# Altium PCB PDB_Rev2.PcbDoc (part 1 of 2)
Units mil, origin at the board's own origin, x right, y up, seen from the top; angles counter-clockwise.
Board outline 2952.76 x 3937.01 mil, 2 copper layers (Top Layer, Bottom Layer); 43 components, 21 nets, 155 pads, 33 vias.
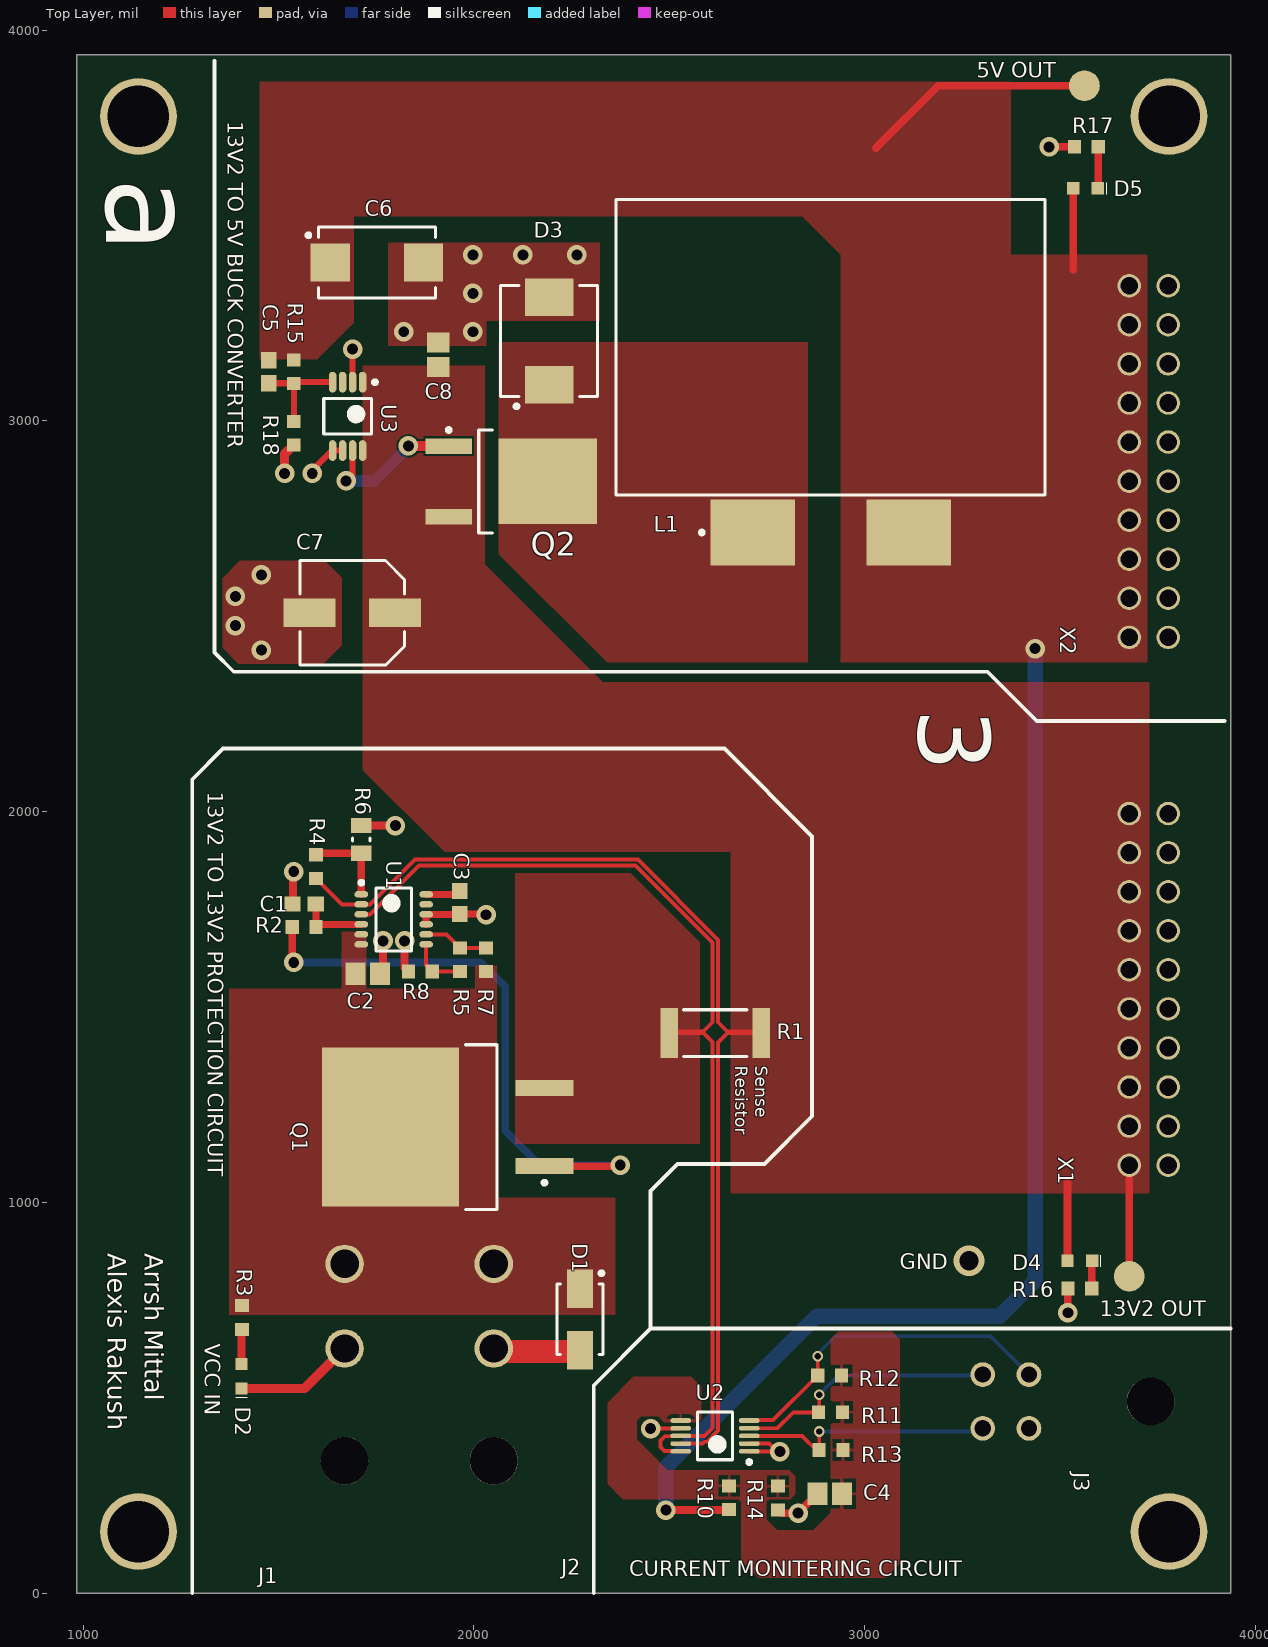
[diagram p0: Top Layer view]
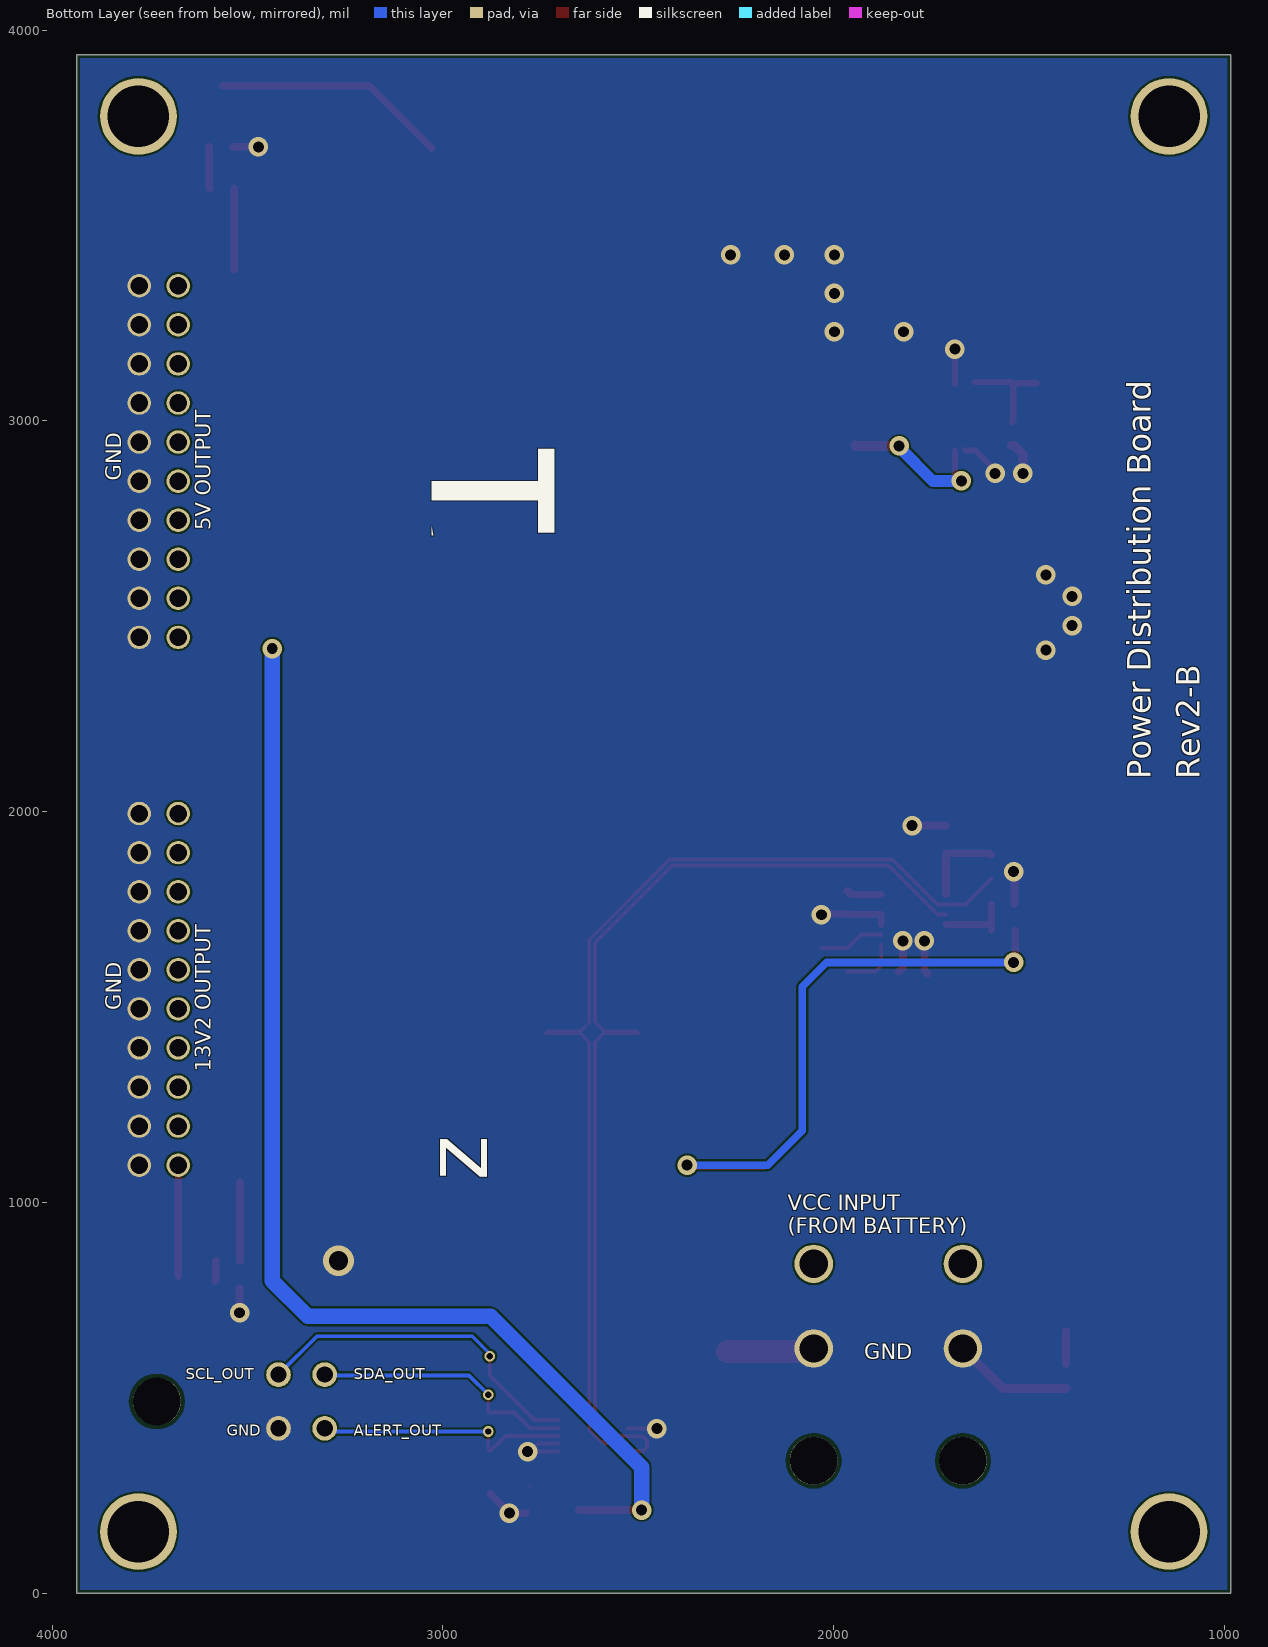
[diagram p1: Bottom Layer view, seen from below]
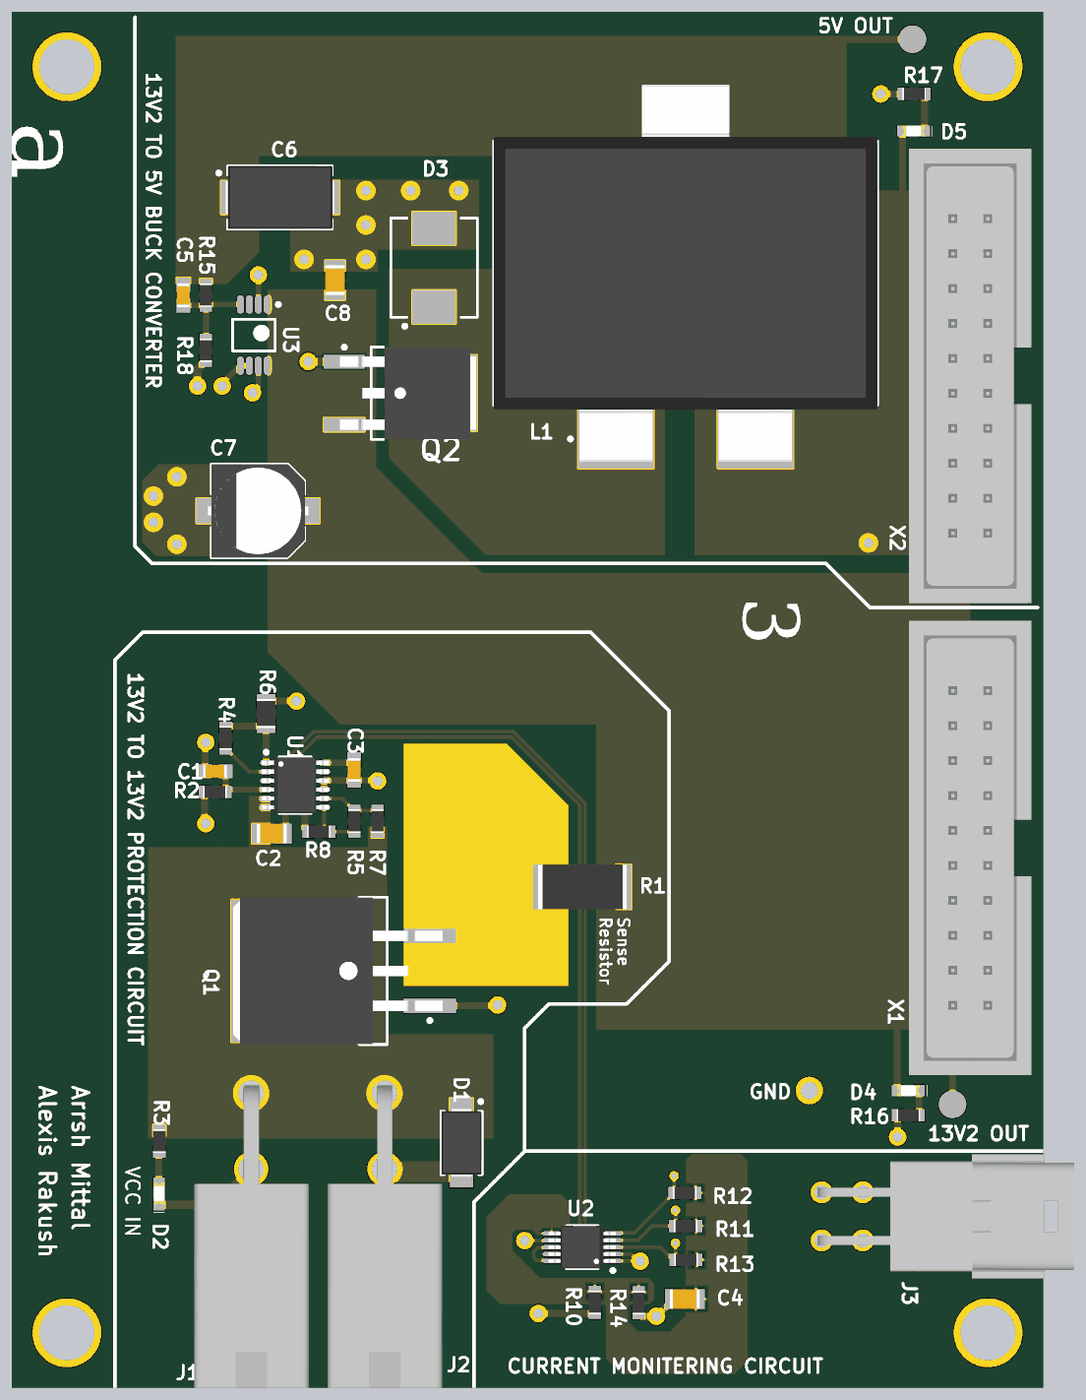
[diagram p2: 3D render of the assembled board from above, using the file's embedded part models]

## Layer stack, top to bottom
Top Solder: solder mask 0.4, Solder Resist, Dk 3.5
Top Layer: signal copper 1.4
Dielectric 1: dielectric 12.6, FR-4, Dk 4.8
Bottom Layer: signal copper 1.4
Bottom Solder: solder mask 0.4, Solder Resist, Dk 3.5

## Board outline
984.25,0 3937.01,0 3937.01,3937.01 984.25,3937.01

## Design rules (kind name [scope] priority, off if disabled: settings)
BoardOutlineClearance [All] p1: gap=7.87 ignorepadtopadclearanceinfootprint=FALSE
Clearance "Stitching HV_GND" [IsStitchingVia and InNet('HV_GND') vs (IsVia and (Not IsStitchingVia)) Or IsPad] p1: gap=5 ignorepadtopadclearanceinfootprint=FALSE
Clearance [All] p2: gap=5 ignorepadtopadclearanceinfootprint=FALSE except(7.87: Arc-SMDPad Track-SMDPad; 9.84: SMDPad-Hole THPad-Hole Via-Hole Fill-Hole Poly-Hole Region-Hole Text-Hole; 10: Arc-Via Arc-Hole Track-Via Track-Hole Via-Via; 12.99: Arc-THPad Track-THPad; 21.26: SMDPad-THPad THPad-THPad)
ComponentClearance [All] p1: gap=5 collisioncheckmode=3 verticalgap=5 showdistances=TRUE
DiffPairsRouting [All] p1: maxlimit=10 minlimit=5 mostfreqgap=5 toplayer_minwidth=5 toplayer_maxwidth=1000 toplayer_prefwidth=5 bottomlayer_minwidth=5 bottomlayer_maxwidth=1000 bottomlayer_prefwidth=5 maxuncoupledlength=500
Height [All] p1: minheight=0 maxheight=71497.94 prefheight=500
HoleSize [All] p1: absolutevalues=TRUE maxlimit=248.03 minlimit=11.81 maxpercent=80.000 minpercent=20.000
HoleToHoleClearance [All] p1: gap=9.84 allowstackedmicrovias=FALSE
MinimumAnnularRing [All] p1: minimumring=3
MinimumSolderMaskSliver [All] p1: minsoldermaskwidth=0
PlaneClearance [All] p1: clearance=5
PlaneConnect PlaneConnectPowerPads [InPadClass('PowerPads')] p1: planeconnectstyle=Direct reliefexpansion=20 reliefentries=4 reliefconductorwidth=10 reliefairgap=10
PlaneConnect [All] p2: pad.planeconnectstyle=Relief pad.reliefexpansion=11.81 pad.reliefentries=4 pad.reliefconductorwidth=10 pad.reliefairgap=5 via.planeconnectstyle=Direct via.reliefexpansion=11.81 via.reliefentries=4 via.reliefconductorwidth=5 via.reliefairgap=5
PolygonConnect HighPowerLines [InNet('13V_N') or InNet('13V_P') or InNet('5V_OUT') or InNet('NetD3_1') or InNet('Vcc') or InNet('GND')] p1: connectstyle=Direct reliefconductorwidth=10 reliefentries=4 polygonreliefangle="90 Angle" airgapwidth=10
PolygonConnect PolygonConnectPowerPads [All vs (InPadClass('PowerPads'))] p2: connectstyle=Direct reliefconductorwidth=10 reliefentries=4 polygonreliefangle="90 Angle" airgapwidth=10
PolygonConnect [All] p3: thpad.connectstyle=Relief thpad.reliefconductorwidth=8 thpad.reliefentries=4 thpad.polygonreliefangle="90 Angle" thpad.airgapwidth=10 smdpad.connectstyle=Relief smdpad.reliefconductorwidth=8 smdpad.reliefentries=4 smdpad.polygonreliefangle="90 Angle" smdpad.airgapwidth=10 via.connectstyle=Direct via.reliefconductorwidth=8 via.reliefentries=4 via.polygonreliefangle="90 Angle" via.airgapwidth=10
RoutingVias [All] p1: holewidth=17.72 width=29.53 viastyle="Through Hole" minholewidth=11.81 minwidth=23.62 maxholewidth=23.62 maxwidth=259.84
SilkToSilkClearance [All] p1: silktosilkclearance=0
SilkToSolderMaskClearance [IsPad] p1: minsilkscreentomaskgap=0 clearancetoexposedcopper=TRUE
SolderMaskExpansion SolderMaskExpansion_Via [IsVia] p1: expansion=4
SolderMaskExpansion [All] p2: expansion=2.95
Width [All] p1: maxlimit=1000 minlimit=5.12 preferedwidth=10 minimp=50.000000 maximp=50.000000 favimp=50.000000
20 further rules are at their usual default settings.

## Classes and differential pairs
component class Designator: C4 C5 C6 C7 C8 D3 D4 D5 J3 L1 Q2 R10 R11 R12 R13 R14 R15 R16 R17 R18 U2 U3 X1 X2
component class Designator: C1 C2 C3 D1 D2 J1 J2 Q1 R1 R2 R3 R4 R5 R6 R7 R8 U1
differential pair 13V: +13V_P -13V_N

## Components (designator, comment, footprint, x,y, rotation, side; value= is the part's Value field where it differs from the comment)
C1 "47nF" CAP-0603 1565.94,1763.78 r0 top
C2 "0.1uF" CAP-0805 1728.26,1585.54 r180 top
C3 "0.1uF" CAP-0603 1964.57,1767.72 r90 top
C4 "0.1uF" CAP-0805 2910.91,254.09 r0 top
C5 "100pF" CAP-0603 1475.39,3125.98 r90 top
C6 "100uF" "CAPMP7343X31N 2917 Tantilum Cap" 1751.97,3405.51 r0 top
C7 "22uF" CAPAE7366X55M 1688.98,2508.86 r180 top
C8 "0.1uF" CAP-0805 1909.45,3169.29 r270 top
D1 "TVS DIODE" DIOM4326X24N 2271.65,700.79 r270 top
D2 "Red" LED-0603 1437.01,507.87 r90 top
D3 "40V" "DO-214AB (SMC)" 2192.91,3204.72 r90 top
D4 "Green" LED-0603 3598.43,881.89 r180 top
D5 "Green" LED-0603 3613.19,3626.97 r180 top
J1 "0768250002" 2X1PIN 1669.29,842.6 r0 top
J2 "0768250002" 2X1PIN 2051.18,842.6 r0 top
J3 "WM11594-ND" 2X2PIN 3421.01,421.57 r90 top
JP1 "Testpoint2" TP2 3677.64,811.02 r90 top
JP2 "Testpoint2" TP2 3562.99,3858.27 r90 top
L1 "10uH" "PQ2614BLA-100K footprint" 2913.39,3188.98 r90 top
Q1 "FDB33N25TM" DPAK254P1524X483-3N 1929.13,1192.91 r180 top
Q2 "DMP3028LK3-13" DPAK229P991X239-3N 2097.44,2845.47 r0 top
R1 "0.002R" RES-2512 2618.11,1433.07 r0 top
R2 "10R" RES-0603 1565.94,1704.72 r180 top
R3 "665Ω" RES-0603 1406.5,705.71 r90 top
R4 "47.5KR" RES-0603 1596.46,1859.25 r270 top
R5 "8.06K" RES-0603 1964.57,1621.06 r270 top
R6 "5.1K" RES-0805 1712.32,1929.13 r270 top
R7 "117K" RES-0603 2031.5,1621.06 r90 top
R8 "10K" RES-0603 1863.19,1590.55 r0 top
R10 "3.4KR" RES-0603 2653.54,244.09 r270 top
R11 "2.2K" RES-0603 2913.39,462.76 r0 top
R12 "2.2K" RES-0603 2910.91,557.24 r0 top
R13 "10K" RES-0603 2914.69,366.14 r0 top
R14 "6.65KR" RES-0603 2778.48,243.27 r270 top
R15 "24KR" RES-0603 1539.37,3125.98 r90 top
R16 "665R" RES-0603 3551.18,779.53 r0 top
R17 "180R" RES-0603 3567.91,3701.77 r0 top
R18 "7.87KR" RES-0603 1539.37,2968.5 r90 top
U1 "LT4363IMS-2#TRPBF" MSOP-12 1795.28,1724.41 r0 top
U2 "INA226AIDGSR" "10-TFSOP, 10-MSOP INA226" 2617.41,402.32 r180 top
U3 "LM3489MMX/NOPB" TSOP8-LM3489MMX/NOPB 1677.17,3011.81 r270 top
X1 "WM6548-ND" MOLEX_20pin(RECT) 3897.64,900.28 r90 top
X2 "WM6548-ND" MOLEX_20pin(RECT) 3897.64,2251.06 r90 top

## Footprints (in the part's own frame and the unit in brackets; to place one, negate y for a bottom-side part, rotate by r counter-clockwise, add the part's x,y. Pads: shape width x height; smd on the part's side, far side on the other; paste and mask are expansions set on the pad)
2X1PIN [mm]
  round 2.5 hole 1.85: 1(0,0) 2(0,-5.5)
  round 3.1 hole 3.1: 3(0,-12.8)
  body extent -4.15,-21.4 4.2,0.56, height 14.55
2X2PIN [mm]
  round 1.6 hole 1.06: 1(0,0) 2(3.5,0) 3(3.5,3) 4(0,3)
  round 3.1 hole 3.1: 5(1.75,-7.91)
  body extent -2.75,-15.37 6.25,3.3, height 13.78
"10-TFSOP, 10-MSOP INA226" [mm]
  oval 1.35x0.3 smd: 1(-2.225,1) 2(-2.225,0.5) 3(-2.225,0) 4(-2.225,-0.5) 5(-2.225,-1) 6(2.225,-1) 7(2.225,-0.5) 8(2.225,0) 9(2.225,0.5) 10(2.225,1)
  silkscreen extent -2.35,-1.55 1.15,1.82, body extent -2.45,-1.55 2.45,1.55, height 1.1
CAP-0603 [mm] "Chip Capacitor, 2-Leads, Body 1.60x0.80mm, IPC Medium Density"
  rect 1.05x1 smd: 1(-0.75,0) 2(0.75,0)
  body extent -0.87,-0.48 0.87,0.48, height 0.9
CAP-0805 [mm] "Chip Capacitor, 2-Leads, Body 2.00x1.25mm, IPC Medium Density"
  rect 1.3x1.45 smd: 1(-0.8,0) 2(0.8,0)
  body extent -1.1,-0.72 1.1,0.72, height 1.35
CAPAE7366X55M [mm] "Aluminum Electrolytic Capacitor, Body 6.60x6.60x5.50mm, IPC Low Density"
  rect 3.4x1.85 smd: 1(-2.775,0) 2(2.775,0)
  silkscreen extent -3.4,-3.4 3.4,3.4, body extent -3.65,-3.4 3.65,3.4, height 5.5
"CAPMP7343X31N 2917 Tantilum Cap" [mm] "Molded Capacitor, 2-Leads, Body 7.30x4.30mm, IPC Medium Density"
  rect 2.55x2.45 smd: 1(-3.025,0) 2(3.025,0)
  silkscreen extent -4.57,-2.3 3.8,2.3, body extent -4.02,-2.3 4.02,2.3, height 3.1
DIOM4326X24N [mm] "Molded Diode, 2-Leads, Body 4.30x2.61mm, IPC Medium Density"
  rect 2.5x1.7 smd: 1(-2,0) 2(2,0)
  silkscreen extent -3.12,-1.5 2.3,1.53, body extent -2.52,-1.46 2.52,1.46, height 2.4
"DO-214AB (SMC)" [mm] "Molded Diode, 2-Leads, Body 6.86x5.91mm, IPC Medium Density"
  rect 2.45x3.15 smd mask+0.075: 1(-2.85,0)
  rect 2.45x3.15 smd: 2(2.85,0)
  silkscreen extent -4.37,-3.15 3.6,3.15, body extent -3.55,-3.11 3.56,3.11, height 2.62
DPAK229P991X239-3N [mm] "D-PAK, 3-Pads, Body 6.20x6.71mm (max), IPC Medium Density"
  rect 3x1 smd: 1(-4.1,2.29) 3(-4.1,-2.29)
  rect 6.4x5.55 smd: 2(2.35,0)
  silkscreen extent -4.22,-3.35 -1.25,3.46, body extent -4.42,-3.35 5.49,3.35, height 2.39
DPAK254P1524X483-3N [mm] "D2-PAK, 3-Pads, Body 7.93x8.70mm (max), IPC Medium Density"
  rect 3.8x1.05 smd: 1(-6.4,2.54) 3(-6.4,-2.54)
  rect 8.9x10.35 smd: 4(3.6,0)
  silkscreen extent -6.53,-5.35 -1.25,5.35, body extent -7.35,-5.33 7.9,5.33, height 5.08
LED-0603 [mm]
  rect 0.8x0.8 smd: 1(2,0.8) 2(0.4,0.8)
  silkscreen extent -0.18,0.43 -0.18,1.17, body extent 0.4,0.4 2,1.2, height 0.7
MOLEX_20pin(RECT) [mil]
  round 60 hole 44.88: 1(195,220) 2(295,220) 3(395,220) 4(495,220) 5(595,220) 6(695,220) 7(795,220) 8(895,220) 9(995,220) 10(1095,220) 11(195,120) 12(295,120) 13(395,120) 14(495,120) 15(595,120) 16(695,120) 17(795,120) 18(895,120) 19(995,120) 20(1095,120)
  body extent -6,-6 1294,344, height 366
MSOP-12 [mm] "TSOP, 12-Leads, Body 4.04x3.00mm, Pitch 0.65mm, IPC Medium Density"
  oval 0.889x0.42 smd: 1(-2.107,1.625) 2(-2.107,0.975) 3(-2.107,0.325) 4(-2.107,-0.325) 5(-2.107,-0.975) 6(-2.107,-1.625) 7(2.107,-1.625) 8(2.107,-0.975) 9(2.107,-0.325) 10(2.107,0.325) 11(2.107,0.975) 12(2.107,1.625)
  silkscreen extent -2.23,-2.05 1.15,2.51, body extent -2.45,-2.05 2.45,2.05, height 1.1
"PQ2614BLA-100K footprint" [mm] "SOT223, 3-Leads, Body 27.90x27.51mm (avg), Pitch 10.15mm, IPC Medium Density"
  rect 4.3x5.5 smd: 1(-12.05,5.075) 2(-12.05,-5.075)
  silkscreen extent -12.17,-13.95 9.6,13.95, body extent -13.71,-13.95 13.71,13.95, height 16
RES-0603 [mm] "Chip Resistor, 2-Leads, Body 1.60x0.80mm, IPC Medium Density"
  rect 0.85x0.9 smd: 1(-0.775,0) 2(0.775,0)
  body extent -0.85,-0.45 0.85,0.45, height 0.55
RES-0805 [mm] "Chip Resistor, 2-Leads, Body 2.00x1.25mm, IPC Medium Density"
  rect 1x1.35 smd: 1(-0.9,0) 2(0.9,0)
  silkscreen extent -0.1,-0.58 0.1,0.58, body extent -1.05,-0.67 1.05,0.67, height 0.6
RES-2512 [mm] "Chip Resistor, 2-Leads, Body 6.35x3.10mm, IPC Medium Density"
  rect 1.15x3.25 smd: 1(-3,0) 2(3,0)
  silkscreen extent -2.05,-1.52 2.05,1.53, body extent -3.22,-1.63 3.22,1.63, height 0.65
TP2 [mm]
  round 2 smd: 1(0,0)
TSOP8-LM3489MMX/NOPB [mm] "TSOP, 8-Leads, Body 3.00x3.00mm, Pitch 0.65mm, IPC Medium Density"
  oval 1.35x0.5 smd: 1(-2.225,0.975) 2(-2.225,0.325) 3(-2.225,-0.325) 4(-2.225,-0.975) 5(2.225,-0.975) 6(2.225,-0.325) 7(2.225,0.325) 8(2.225,0.975)
  silkscreen extent -2.35,-1.55 1.15,1.9, body extent -1.55,-1.55 1.55,1.55, height 1.1

## Part data
C1: library part 0603-47nF-50V, "CAP CER 0.047UF 50V X7R 0603", Case/Package=0603, Case Code (Metric)=1608, Dielectric=X7R, Manufacturer=Yageo, Manufacturer Part Number=CC0603KRX7R9BB473, Max Operating Temperature=125°C, Min Operating Temperature=-55°C, Package Quantity=1, Supplier Part Number 1=311-1427-6-ND, Tolerance=10%, Voltage=50V, Capacitance=47nF, Case Code (Imperial)=0603, ComponentLink1Description=http://www.yageo.com/documents/recent/UPY-GPHC_X7R_6.3V-to-50V_18.pdf?src-supplier=Digi-Key, ComponentLink1URL=http://www.yageo.com/documents/recent/UPY-GPHC_X7R_6.3V-to-50V_18.pdf?src-supplier=Digi-Key, ComponentLink2Description=http://www.yageo.com/exep/pages/download/literatures/ProductSelectionGuide%202014_Final_2.pdf?src-supplier=Digi-Key, ComponentLink2URL=http://www.yageo.com/exep/pages/download/literatures/ProductSelectionGuide%202014_Final_2.pdf?src-supplier=Digi-Key, ComponentLink3Description=http://documents.rs-components.com/techlib://itc_doclist_GB.htm?stockno=6698811&src-supplier=RSComponents, ComponentLink3URL=http://documents.rs-components.com/techlib://itc_doclist_GB.htm?stockno=6698811&src-supplier=RSComponents, ComponentLink4Description=http://www.farnell.com/datasheets/1489800.pdf?src-supplier=Element14, ComponentLink4URL=http://www.farnell.com/datasheets/1489800.pdf?src-supplier=Element14, ComponentLink5Description=https://www.verical.com/server-webapp/html/getDatasheet?partID=403593&src-supplier=Verical, ComponentLink5URL=https://www.verical.com/server-webapp/html/getDatasheet?partID=403593&src-supplier=Verical, Composition=Ceramic, Depth=0.8mm, Halogen Free="Halogen Free", Height=0.8mm, Lead Free="Lead Free", Length=1.6mm, Mount="Surface Mount", Packaging="Tape and Reel", Pricing 1="1=0.1, 10=0.058, 100=0.0257, 500=0.01836, 1000=0.01443 (USD)", Radiation Hardening=No, REACH SVHC=Unknown, Stock 1=196940, Supplier 1=Digi-Key, Termination=SMD/SMT, Thickness=0.035inch, Voltage Rating=50V, Voltage Rating (DC)=50V, Width=0.031inch
C2 C8: library part 0805-0.1uF-50V, "CAP CER 0.1UF 50V Y5V 0805", Capacitance=100nF, Case/Package=0805, Case Code (Metric)=2012, Dielectric=Y5V, Dielectric Material=Ceramic, Manufacturer=KEMET, Manufacturer Part Number=C0805C104Z5VACTU, Max Operating Temperature=85°C, Min Operating Temperature=-30°C, Package Quantity=1, Supplier Part Number 1=399-1177-6-ND, Tolerance=80%, Voltage=50V, Case Code (Imperial)=0805, ComponentLink1Description=http://www.alliedelec.com/m/d/9bfe7773041ffe9d406e68bc7b377fdd.pdf?src-supplier=Allied+Electronics, ComponentLink1URL=http://www.alliedelec.com/m/d/9bfe7773041ffe9d406e68bc7b377fdd.pdf?src-supplier=Allied+Electronics, ComponentLink2Description=https://www.verical.com/server-webapp/html/getDatasheet?partID=37101&src-supplier=Verical, ComponentLink2URL=https://www.verical.com/server-webapp/html/getDatasheet?partID=37101&src-supplier=Verical, ComponentLink3Description=https://www.verical.com/server-webapp/html/getDatasheet?partID=321176&src-supplier=Verical, ComponentLink3URL=https://www.verical.com/server-webapp/html/getDatasheet?partID=321176&src-supplier=Verical, ComponentLink4Description=http://www.farnell.com/datasheets/2123124.pdf?src-supplier=Element14, ComponentLink4URL=http://www.farnell.com/datasheets/2123124.pdf?src-supplier=Element14, Depth=1.25mm, Dissipation Factor=5%, Height=0.9mm, Lead Free="Lead Free", Lead Pitch=0.75mm, Length=2mm, Mount="Surface Mount,PCB", Number of Pins=2, Packaging="Tape and Reel", Pricing 1="1=0.1, 10=0.057, 100=0.0254, 500=0.01818, 1000=0.01428 (USD)", Radiation Hardening=No, REACH SVHC="No SVHC", Stock 1=929243, Supplier 1=Digi-Key, Termination=SMD/SMT, Thickness=0.039inch, Voltage Rating=50V, Voltage Rating (DC)=50V, Width=0.049inch
C3: library part 0603-0.1uF-16V, "CAP CER 0.1UF 16V X7R 0603", Capacitance=100nF, Case/Package=0603, Case Code (Metric)=1608, Dielectric=X7R, Dielectric Material=Ceramic, Manufacturer=KEMET, Manufacturer Part Number=C0603C104M4RACTU, Max Operating Temperature=125°C, Min Operating Temperature=-55°C, Package Quantity=1, Supplier Part Number 1=399-1099-6-ND, Tolerance=20%, Voltage Rating=16V, Case Code (Imperial)=0603, ComponentLink1Description=https://www.verical.com/server-webapp/html/getDatasheet?partID=66190&src-supplier=Verical, ComponentLink1URL=https://www.verical.com/server-webapp/html/getDatasheet?partID=66190&src-supplier=Verical, ComponentLink2Description=http://www.farnell.com/datasheets/2746055.pdf?src-supplier=Element14, ComponentLink2URL=http://www.farnell.com/datasheets/2746055.pdf?src-supplier=Element14, ComponentLink3Description=http://www.farnell.com/datasheets/2123765.pdf?src-supplier=Element14, ComponentLink3URL=http://www.farnell.com/datasheets/2123765.pdf?src-supplier=Element14, ComponentLink4Description=http://www.alliedelec.com/m/d/9bfe7773041ffe9d406e68bc7b377fdd.pdf?src-supplier=Allied+Electronics, ComponentLink4URL=http://www.alliedelec.com/m/d/9bfe7773041ffe9d406e68bc7b377fdd.pdf?src-supplier=Allied+Electronics, ComponentLink5Description=https://www.verical.com/server-webapp/html/getDatasheet?partID=302288&src-supplier=Verical, ComponentLink5URL=https://www.verical.com/server-webapp/html/getDatasheet?partID=302288&src-supplier=Verical, Depth=0.8mm, Height=0.8mm, Lead Pitch=0.7mm, Length=1.6mm, Mount="Surface Mount,PCB", Number of Pins=2, Packaging="Tape and Reel", Pricing 1="1=0.1, 10=0.036, 100=0.0161, 500=0.01152, 1000=0.00904 (USD)", Radiation Hardening=No, REACH SVHC="No SVHC", Stock 1=254524, Supplier 1=Digi-Key, Termination=SMD/SMT, Thickness=0.034inch, Voltage Rating (DC)=16V, Width=0.031inch
C4: library part 0805-0.1uF-16V, "CAP CER 0.1UF 16V Y5V 0805", Capacitance=100nF, Case/Package=0805, Case Code (Metric)=2012, Dielectric=Y5V, Dielectric Material=Ceramic, Manufacturer=KEMET, Manufacturer Part Number=C0805C104Z4VACTU, Max Operating Temperature=85°C, Min Operating Temperature=-30°C, Package Quantity=1, Supplier Part Number 1=399-9159-6-ND, Tolerance=80%, Voltage Rating=16V, Case Code (Imperial)=0805, ComponentLink1Description=https://search.kemet.com/component-edge/download/datasheet/C0805C104Z4VACTU.pdf?src-supplier=Digi-Key, ComponentLink1URL=https://search.kemet.com/component-edge/download/datasheet/C0805C104Z4VACTU.pdf?src-supplier=Digi-Key, ComponentLink2Description=https://api.kemet.com/component-edge/download/datasheet/C0805C104Z4VACTU.pdf?src-supplier=Digi-Key, ComponentLink2URL=https://api.kemet.com/component-edge/download/datasheet/C0805C104Z4VACTU.pdf?src-supplier=Digi-Key, ComponentLink3Description=http://www.mouser.com/ds/2/212/KEM_C1005_Y5V_SMD-1101305.pdf?src-supplier=Mouser, ComponentLink3URL=http://www.mouser.com/ds/2/212/KEM_C1005_Y5V_SMD-1101305.pdf?src-supplier=Mouser, ComponentLink4Description=http://components.arrow.com/part/dataview/2091119S8993596N7429?src-supplier=Arrow, ComponentLink4URL=http://components.arrow.com/part/dataview/2091119S8993596N7429?src-supplier=Arrow, Depth=1.25mm, Height=0.78mm, Lead Free="Lead Free", Lead Pitch=0.75mm, Length=2mm, Mount="Surface Mount", Packaging="Tape and Reel", Pricing 1="1=0.11, 10=0.081, 100=0.038, 500=0.02664, 1000=0.02205 (USD)", Stock 1=18565, Supplier 1=Digi-Key, Termination=SMD/SMT, Thickness=0.035inch, Voltage Rating (DC)=16V, Width=0.049inch
C5: library part 0603-100pF-50V, "0603 100 pF 50 V ±5% Tolerance C0G/NP0 SMT Multilayer Ceramic Capacitor", Manufacturer="Kyocera AVX", Manufacturer Part Number=06035A101JAT2A\4K, Supplier Part Number 1=478-1175-6-ND, Pricing 1="1=0.1, 10=0.074, 50=0.0402, 100=0.0329, 500=0.02348, 1000=0.01845 (USD)", Stock 1=87306, Supplier 1=Digi-Key
C6: library part "2917-100uF Tantalum Cap", "KEMET   T591D107M010ATE080   Surface Mount Tantalum Capacitor, AEC-Q200 T591 Series, 100uF, 2917 [7343-31 Metric], 0.08 ohm", Case/Package=2917, Case Code (Metric)=7343, Dielectric Material=Tantalum, ESR (Equivalent Series Resistance)=80mR, Leakage Current=100uA, Manufacturer=KEMET, Manufacturer Part Number=T591D107M010ATE080, Max Operating Temperature=125°C, Min Operating Temperature=-55°C, Package Quantity=500, Ripple Current=1.677A, Supplier Part Number 1=399-12364-1-ND, Tolerance=20%, Voltage=10V, Capacitance=100uF, Case Code (Imperial)=2917, ComponentLink1Description=https://www.distrelec.biz/Web/Downloads/_t/ds/T591-series_eng_tds.pdf?mime=application%2Fpdf&src-supplier=Distrelec, ComponentLink1URL=https://www.distrelec.biz/Web/Downloads/_t/ds/T591-series_eng_tds.pdf?mime=application%2Fpdf&src-supplier=Distrelec, ComponentLink2Description=http://www.alliedelec.com/images/products/datasheets/bm/KEMET/70428362.pdf?src-supplier=Allied+Electronics, ComponentLink2URL=http://www.alliedelec.com/images/products/datasheets/bm/KEMET/70428362.pdf?src-supplier=Allied+Electronics, Depth=4.3mm, Dissipation Factor=10%, Features="General Purpose", Height=2.8mm, Height - Seated (Max)=0.122inch, Lead Diameter=0.2mm, Lead Pitch=3.8mm, Length=7.3mm, Life (Hours)=2000Hour, Mount="Surface Mount", Packaging="Tape and Reel", Pricing 1="1=1.3, 10=1.023, 50=0.8866, 100=0.7672 (USD)", REACH SVHC="No SVHC", RoHS Compliant=Yes, Stock 1=325, Supplier 1=Digi-Key, Termination=SMD/SMT, Voltage Rating=10V, Voltage Rating (DC)=10V, Weight=0.007408oz, Width=4.3mm
C7: library part AEC-22uF-50V, "Aluminum Electrolytic Capacitors - SMD 22uF 50 Volts 20% LYTICS/IC", Case/Package=Radial, ESR (Equivalent Series Resistance)=9.043R, Manufacturer="CDE Illinois Capacitor", Manufacturer Part Number=226SML050M, Max Operating Temperature=85°C, Min Operating Temperature=-40°C, Package Quantity=1000, Ripple Current=71mA, Supplier Part Number 1=1572-1392-6-ND, Tolerance=20%, Voltage Rating=50V, Capacitance=22uF, ComponentLink1Description=http://www.illinoiscapacitor.com/pdf/seriesDocuments/SML%20series.pdf?src-supplier=Future+Electronics, ComponentLink1URL=http://www.illinoiscapacitor.com/pdf/seriesDocuments/SML%20series.pdf?src-supplier=Future+Electronics, Diameter=6.3mm, Height - Seated (Max)=0.217inch, Lead Free="Lead Free", Length=5.8mm, Life (Hours)=2000Hour, Mount="Surface Mount", Packaging="Tape and Reel", Polarity=Polar, Pricing 1="1=0.36, 10=0.248, 50=0.1732, 100=0.1485, 500=0.11138 (USD)", Stock 1=2681, Supplier 1=Digi-Key, Voltage Rating (DC)=50V
D1: library part SMAJ58A-13-F, "TVS DIODE 58VWM 93.6VC SMA", Breakdown Voltage=64.4V, Capacitance=180pF, Case/Package=SMA, Clamping Voltage=93.6V, Current=43A, Forward Voltage=3.5V, Leakage Current=5uA, Manufacturer=Diodes, Max Breakdown Voltage=71.2V, Max Operating Temperature=150°C, Max Output Current=4.3A, Max Power Dissipation=400W, Max Surge Current=40A, Min Operating Temperature=-55°C, Package Quantity=5000, Power Line Protection=No, Reverse Standoff Voltage=58V, Supplier Part Number 1=SMAJ58A-13-FDIDKR-ND, Test Current=1mA, Composition=Zener, Contact Plating=Matte,Tin, Direction=Unidirectional, Element Configuration=Single, ESD Protection=No, Height=2.3mm, Lead Free="Lead Free", Length=2.92mm, Manufacturer Part Number=SMAJ58A-13-F, Max Reverse Leakage Current=5uA, Min Breakdown Voltage=64.4V, Mount="Surface Mount", Number of Elements=1, Number of Pins=2, Number of Unidirectional Channels=1, Packaging="Tape and Reel", Peak Pulse Current=4.3A, Peak Pulse Power=400W, Polarity=Unidirectional, Power Dissipation=400W, Pricing 1="1=0.41, 10=0.311, 100=0.1937, 500=0.13256, 1000=0.10197 (USD)", Radiation Hardening=No, Reverse Breakdown Voltage=64.4V, Stock 1=387453, Supplier 1=Digi-Key, Termination=SMD/SMT, Voltage=58V, Width=4.6mm, Working Voltage=58V
D2: library part LED-Red, "LED RED CLEAR 0603 SMD", Case/Package=0603, Case Code (Metric)=1608, Forward Current=30mA, Forward Voltage=2V, Manufacturer="Wurth Electronics", Manufacturer Part Number=150060RS75000, Max Operating Temperature=85°C, Min Operating Temperature=-40°C, Package Quantity=1, Supplier Part Number 1=732-4978-6-ND, Test Current=20mA, Case Code (Imperial)=0603, Color=Red, ComponentLink1Description=https://katalog.we-online.de/led/datasheet/150060RS75000.pdf?src-supplier=Digi-Key, ComponentLink1URL=https://katalog.we-online.de/led/datasheet/150060RS75000.pdf?src-supplier=Digi-Key, ComponentLink2Description=http://www.produktinfo.conrad.com/datenblaetter/750000-774999/759428-da-01-en-CHIPLED_0603_W_KL_ROT_150060RS75000.pdf?src-supplier=Conrad, ComponentLink2URL=http://www.produktinfo.conrad.com/datenblaetter/750000-774999/759428-da-01-en-CHIPLED_0603_W_KL_ROT_150060RS75000.pdf?src-supplier=Conrad, Dominant Wavelength=625nm, Height=0.7mm, Length=1.6mm, Lens Style=Clear,Rectangular, Luminous Intensity=250mcd, Mount="Surface Mount", Packaging="Cut Tape", Pricing 1="1=0.14, 50=0.133, 100=0.114, 500=0.099 (USD)", REACH SVHC=Unknown, Stock 1=18518, Supplier 1=Digi-Key, Viewing Angle=140°, Wavelength=625nm, Width=0.8mm
D3: library part Schottky-40V-8A, "DIODE SCHOTTKY 40V 8A DO214AB", Average Rectified Current=8A, Forward Voltage=650mV, Manufacturer=MCC, Manufacturer Part Number=SK84L-TP, Max Forward Surge Current (Ifsm)=200A, Max Operating Temperature=150°C, Max Reverse Current=20mA, Min Operating Temperature=-55°C, Package Quantity=1, Supplier Part Number 1=SK84L-TPMSDKR-ND, ComponentLink1Description=http://www.mccsemi.com/up_pdf/SK82L-SK810L(SMC).PDF?src-supplier=Future+Electronics, ComponentLink1URL=http://www.mccsemi.com/up_pdf/SK82L-SK810L(SMC).PDF?src-supplier=Future+Electronics, ComponentLink2Description=http://www.mccsemi.com/up_pdf/SK82L-SK810L(SMC).PDF?src-supplier=Digi-Key, ComponentLink2URL=http://www.mccsemi.com/up_pdf/SK82L-SK810L(SMC).PDF?src-supplier=Digi-Key, Forward Current=8A, Lead Free="Lead Free", Max Repetitive Reverse Voltage (Vrrm)=40V, Max Reverse Voltage (DC)=40V, Mount="Surface Mount", Number of Pins=2, Packaging="Tape and Reel", Pricing 1="1=0.72, 10=0.62, 100=0.4293, 500=0.3587, 1000=0.30528 (USD)", RoHS Compliant=Yes, Series=SK84L, Stock 1=7713, Supplier 1=Digi-Key
D4 D5: library part LED-Green, "LED GREEN CLEAR 0603 SMD", Case/Package=0603, Case Code (Metric)=1608, Forward Current=30mA, Forward Voltage=2V, Manufacturer="Wurth Electronics", Manufacturer Part Number=150060VS75000, Max Operating Temperature=85°C, Min Operating Temperature=-40°C, Package Quantity=1, Supplier Part Number 1=732-4980-1-ND, Test Current=20mA, Case Code (Imperial)=0603, Color=Green, ComponentLink1Description=https://katalog.we-online.de/led/datasheet/150060VS75000.pdf?src-supplier=Digi-Key, ComponentLink1URL=https://katalog.we-online.de/led/datasheet/150060VS75000.pdf?src-supplier=Digi-Key, Dominant Wavelength=570nm, Height=0.7mm, Length=1.6mm, Lens Style=Clear,Rectangular, Luminous Intensity=40mcd, Mount="Surface Mount", Number of Pins=2, Packaging="Tape and Reel", Pricing 1="1=0.14, 50=0.133, 100=0.114, 500=0.099 (USD)", REACH SVHC=Unknown, Stock 1=118118, Supplier 1=Digi-Key, Viewing Angle=140°, Wavelength=570nm, Width=0.8mm
J1 J2: library part 2X1PIN, "CONN HEADER R/A 2POS", Color=Black, Manufacturer=Molex, Manufacturer Part Number=76825-0002, Supplier Part Number 1=WM11969-ND, ComponentLink1Description=http://www.farnell.com/datasheets/1968956.pdf?src-supplier=Element14, ComponentLink1URL=http://www.farnell.com/datasheets/1968956.pdf?src-supplier=Element14, ComponentLink2Description=http://www.farnell.com/datasheets/2216551.pdf?src-supplier=Newark, ComponentLink2URL=http://www.farnell.com/datasheets/2216551.pdf?src-supplier=Newark, ComponentLink3Description=http://www.farnell.com/datasheets/2216551.pdf?src-supplier=Farnell, ComponentLink3URL=http://www.farnell.com/datasheets/2216551.pdf?src-supplier=Farnell, ComponentLink4Description=https://www.molex.com/pdm_docs/sd/768250002_sd.pdf?src-supplier=Digi-Key, ComponentLink4URL=https://www.molex.com/pdm_docs/sd/768250002_sd.pdf?src-supplier=Digi-Key, ComponentLink5Description=http://www.farnell.com/datasheets/2001779.pdf?src-supplier=Element14, ComponentLink5URL=http://www.farnell.com/datasheets/2001779.pdf?src-supplier=Element14, ComponentLink6Description=http://www.alliedelec.com/images/products/datasheets/bm/BrandonData/70717238.pdf?src-supplier=Allied+Electronics, ComponentLink6URL=http://www.alliedelec.com/images/products/datasheets/bm/BrandonData/70717238.pdf?src-supplier=Allied+Electronics, Contact Material=Copper, Contact Plating=Tin, Gender=Male, Number of Circuits=2, Number of Contacts=2, Number of Rows=2, Orientation="Right Angle", Pitch=5.7mm, Pricing 1="1=1.13, 10=0.993, 25=0.9344, 50=0.8956, 100=0.8567, 250=0.7788, 500=0.70092, 1000=0.62304, 2500=0.56463 (USD)", REACH SVHC=Unknown, Stock 1=0, Supplier 1=Digi-Key, Termination="Through Hole"
J3: library part 2X2PIN, "CONN HEADER R/A 4POS 3.5MM", Color=Black, Manufacturer=Molex, Manufacturer Part Number=172316-1104, ComponentLink1Description=http://www.alliedelec.com/images/products/datasheets/bm/MOLEX/70617684.pdf?src-supplier=Allied+Electronics, ComponentLink1URL=http://www.alliedelec.com/images/products/datasheets/bm/MOLEX/70617684.pdf?src-supplier=Allied+Electronics, ComponentLink2Description=http://www.farnell.com/datasheets/1944206.pdf?src-supplier=Element14, ComponentLink2URL=http://www.farnell.com/datasheets/1944206.pdf?src-supplier=Element14, ComponentLink3Description=http://www.farnell.com/datasheets/2214524.pdf?src-supplier=Farnell, ComponentLink3URL=http://www.farnell.com/datasheets/2214524.pdf?src-supplier=Farnell, ComponentLink4Description=https://www.molex.com/pdm_docs/sd/1723161104_sd.pdf?src-supplier=Digi-Key, ComponentLink4URL=https://www.molex.com/pdm_docs/sd/1723161104_sd.pdf?src-supplier=Digi-Key, ComponentLink5Description=http://www.farnell.com/datasheets/1955765.pdf?src-supplier=Element14, ComponentLink5URL=http://www.farnell.com/datasheets/1955765.pdf?src-supplier=Element14, Connector Type="Male Pin", Contact Material="Copper Alloy", Contact Plating=Tin, Fastening Type=Latch, Gender=Male, Mount="Through Hole", Number of Circuits=4, Number of Contacts=4, Number of Pins=4, Number of Positions=4, Number of Rows=2, Packaging=Tray, Pitch=0.138inch, Pricing 1="1=0.93, 10=0.814, 100=0.7027, 500=0.57492, 1000=0.51104, 5000=0.44716, 10000=0.4248 (USD)", REACH SVHC=Unknown, Row Spacing=0.181inch, Stock 1=4392, Supplier 1=Digi-Key, Supplier Part Number 1=WM11594-ND, Termination=Solder
JP1 JP2: "Single layer pad TP"
L1: library part 10uH-30A, "Inductor Power Shielded Wirewound 10uH 10% 100KHz Ferrite 30A 0.0016Ohm DCR Automotive Tray", Case/Package=Nonstandard, Current Rating=30A, DC Resistance (DCR)=1.6mR, Manufacturer=Bourns, Manufacturer Part Number=PQ2614BLA-100K, Max Operating Temperature=155°C, Min Operating Temperature=-40°C, Ratings=AEC-Q200, Resistor Type=Wirewound, Saturation Current=16.2A, Self Resonant Frequency=20MHz, Supplier Part Number 1=PQ2614BLA-100K-ND, Test Frequency=100kHz, Tolerance=10%, ComponentLink1Description=https://www.bourns.com/docs/Product-Datasheets/PQ2614.pdf?src-supplier=Digi-Key, ComponentLink1URL=https://www.bourns.com/docs/Product-Datasheets/PQ2614.pdf?src-supplier=Digi-Key, Core Material=Ferrite, Inductance=10uH, Mount="Surface Mount", Packaging=Tray, Pricing 1="1=3.64, 10=3.333, 25=3.03, 50=2.5452, 100=2.1816, 250=2.0604, 500=1.9392, 1000=1.818, 2500=1.7574 (USD)", RoHS Compliant=Yes, Shielding=Shielded, Stock 1=630, Supplier 1=Digi-Key
Q1: "Trans MOSFET N-CH 250V 33A 3-Pin(2+Tab) D2PAK T/R", Case/Package=D2PAK, Continuous Drain Current (ID)=33A, Drain-source On Resistance-Max=94MR, Drain to Source Breakdown Voltage=250V, Drain to Source Resistance=94mR, Gate to Source Voltage (Vgs)=30V, Input Capacitance=2.135nF, Manufacturer="ON Semiconductor / Fairchild", Max Operating Temperature=150°C, Max Power Dissipation=235W, Min Operating Temperature=-55°C, Package Quantity=800, Supplier Part Number 1=FDB33N25TMDKR-ND, Threshold Voltage=3V, ComponentLink1Description=http://www.farnell.com/datasheets/2304001.pdf?src-supplier=Element14, ComponentLink1URL=http://www.farnell.com/datasheets/2304001.pdf?src-supplier=Element14, ComponentLink2Description=https://www.fairchildsemi.com/datasheets/FD/FDB33N25.pdf?src-supplier=Avnet+Europe, ComponentLink2URL=https://www.fairchildsemi.com/datasheets/FD/FDB33N25.pdf?src-supplier=Avnet+Europe, ComponentLink3Description=https://www.fairchildsemi.com/datasheets/FD/FDB33N25.pdf?src-supplier=Digi-Key, ComponentLink3URL=https://www.fairchildsemi.com/datasheets/FD/FDB33N25.pdf?src-supplier=Digi-Key, ComponentLink4Description=https://www.onsemi.com/pub/Collateral/FDB33N25-D.pdf?src-supplier=Digi-Key, ComponentLink4URL=https://www.onsemi.com/pub/Collateral/FDB33N25-D.pdf?src-supplier=Digi-Key, Contact Plating=Tin,Matte, Drain to Source Voltage (Vdss)=250V, Element Configuration=Single, Fall Time=120ns, Height=4.83mm, Lead Free="Lead Free", Length=10.67mm, Manufacturer Part Number=FDB33N25TM, Mount="Surface Mount", Nominal Vgs=3V, Number of Elements=1, Number of Pins=3, On-State Resistance=94MR, Packaging="Tape and Reel", Polarity=N-CHANNEL, Power Dissipation=235W, Pricing 1="1=1.88, 10=1.559, 25=1.508, 100=1.2407 (USD)", Radiation Hardening=No, Rds On Max=94mR, REACH SVHC="No SVHC", Rise Time=230ns, Series=UniFET™, Stock 1=186, Supplier 1=Digi-Key, Turn-Off Delay Time=75ns, Turn-On Delay Time=35ns, Weight=1.31247g, Width=11.33mm
Q2: library part P-FET-30V-27A, "MOSFET P-CH 30V 27A TO252", Case/Package=TO-252-3, Continuous Drain Current (ID)=27A, Drain to Source Voltage (Vdss)=30V, Input Capacitance=1.241nF, Manufacturer=Diodes, Max Operating Temperature=150°C, Max Power Dissipation=1.6W, Min Operating Temperature=-55°C, Supplier Part Number 1=DMP3028LK3-13DICT-ND, ComponentLink1Description=http://www.mouser.com/ds/2/115/DMP3028LK3-526241.pdf?src-supplier=Mouser, ComponentLink1URL=http://www.mouser.com/ds/2/115/DMP3028LK3-526241.pdf?src-supplier=Mouser, ComponentLink2Description=https://www.diodes.com/assets/Datasheets/DMP3028LK3.pdf?src-supplier=Digi-Key, ComponentLink2URL=https://www.diodes.com/assets/Datasheets/DMP3028LK3.pdf?src-supplier=Digi-Key, Manufacturer Part Number=DMP3028LK3-13, Mount="Surface Mount", Packaging="Tape and Reel", Pricing 1="1=0.62, 10=0.536, 25=0.5116, 100=0.3712, 500=0.3102, 1000=0.264 (USD)", Rds On Max=25mR, RoHS Compliant=Yes, Stock 1=3306, Supplier 1=Digi-Key
R1: library part 2512-0.002R-5W, "BOURNS - CSS2H-2512K-2L00F - SMD Current Sense Resistor, 0.002 ohm, CSS2H-2512 Series, 2512 [6432 Metric], 5 W, ± 1%", Case/Package=2512, Case Code (Metric)=6432, Manufacturer=Bourns, Manufacturer Part Number=CSS2H-2512K-2L00F, Max Operating Temperature=170°C, Max Power Dissipation=5W, Min Operating Temperature=-55°C, Resistance=2mR, Resistor Type="Metal Element,Metal Strip", Supplier Part Number 1=CSS2H-2512K-2L00FDKR-ND, Temperature Coefficient=50ppm/°C, Tolerance=1%, Case Code (Imperial)=2512, ComponentLink1Description=http://www.farnell.com/datasheets/2058210.pdf?src-supplier=Farnell, ComponentLink1URL=http://www.farnell.com/datasheets/2058210.pdf?src-supplier=Farnell, ComponentLink2Description=http://www.farnell.com/datasheets/2058210.pdf?src-supplier=Element14, ComponentLink2URL=http://www.farnell.com/datasheets/2058210.pdf?src-supplier=Element14, ComponentLink3Description=http://www.mouser.com/ds/2/54/ss2h-2512-935127.pdf?src-supplier=Mouser, ComponentLink3URL=http://www.mouser.com/ds/2/54/ss2h-2512-935127.pdf?src-supplier=Mouser, ComponentLink4Description=http://www.farnell.com/datasheets/2058210.pdf?src-supplier=Newark, ComponentLink4URL=http://www.farnell.com/datasheets/2058210.pdf?src-supplier=Newark, ComponentLink5Description=https://www.bourns.com/docs/Product-Datasheets/css2h-2512.pdf?src-supplier=Digi-Key, ComponentLink5URL=https://www.bourns.com/docs/Product-Datasheets/css2h-2512.pdf?src-supplier=Digi-Key, ComponentLink6Description=http://www.bourns.com/docs/Product-Datasheets/css2h-2512.pdf?src-supplier=Digi-Key, ComponentLink6URL=http://www.bourns.com/docs/Product-Datasheets/css2h-2512.pdf?src-supplier=Digi-Key, Features="Moisture Resistant", Height=0.02inch, Length=0.25inch, Number of Terminations=2, Packaging="Cut Tape", Power Rating=5W, Pricing 1="1=0.88, 10=0.775, 25=0.7124, 50=0.65, 100=0.5625, 250=0.475, 500=0.4, 1000=0.3325 (USD)", REACH SVHC="No SVHC", RoHS Compliant=Yes, Stock 1=1384, Supplier 1=Digi-Key, Width=0.12inch
R2: library part 0603-10R, "RES SMD 10 OHM 1% 1/10W 0603", Case/Package=0805, Case Code (Metric)=2012, Manufacturer=Yageo, Manufacturer Part Number=RC0805FR-0710RL, Max Operating Temperature=155°C, Max Power Dissipation=125mW, Min Operating Temperature=-55°C, Package Quantity=1, Supplier Part Number 1=311-10LDDKR-ND, Temperature Coefficient=200ppm/°C, Tolerance=1%, Voltage Rating=150V, Case Code (Imperial)=0805, ComponentLink1Description=http://www.farnell.com/datasheets/444164.pdf?src-supplier=Element14, ComponentLink1URL=http://www.farnell.com/datasheets/444164.pdf?src-supplier=Element14, ComponentLink2Description=http://www.farnell.com/datasheets/2167052.pdf?src-supplier=Element14, ComponentLink2URL=http://www.farnell.com/datasheets/2167052.pdf?src-supplier=Element14, ComponentLink3Description=http://www.farnell.com/datasheets/2167052.pdf?src-supplier=Mouser, ComponentLink3URL=http://www.farnell.com/datasheets/2167052.pdf?src-supplier=Mouser, ComponentLink4Description=http://www.yageo.com/documents/recent/PYu-RC_Group_51_RoHS_L_10.pdf?src-supplier=Digi-Key, ComponentLink4URL=http://www.yageo.com/documents/recent/PYu-RC_Group_51_RoHS_L_10.pdf?src-supplier=Digi-Key, Composition="Thick Film", Depth=1.25mm, Features="Moisture Resistant", Height=0.5mm, Lead Free="Lead Free", Length=2mm, Number of Pins=2, Number of Terminations=2, Packaging="Tape and Reel", Power Rating=125mW, REACH SVHC="No SVHC", Resistance=10R, Supplier 1=Digi-Key, Termination=SMD/SMT, Voltage Rating (DC)=150V, Width=1.25mm
R3: library part 0603-665R, "RES SMD 665 OHM 1% 1/10W 0603", Case/Package=0603, Case Code (Metric)=1608, Manufacturer=Yageo, Manufacturer Part Number=RC0603FR-07665RL, Max Operating Temperature=155°C, Max Power Dissipation=100mW, Min Operating Temperature=-55°C, Package Quantity=1, Resistance=665R, Supplier Part Number 1=311-665HRDKR-ND, Temperature Coefficient=100ppm/°C, Tolerance=1%, Voltage Rating=75V, Voltage Rating (DC)=50V, Case Code (Imperial)=0603, ComponentLink1Description=http://www.yageo.com/documents/recent/PYu-RC_Group_51_RoHS_L_9.pdf?src-supplier=Digi-Key, ComponentLink1URL=http://www.yageo.com/documents/recent/PYu-RC_Group_51_RoHS_L_9.pdf?src-supplier=Digi-Key, ComponentLink2Description=http://www.yageo.com/documents/recent/PYu-RC0603_51_RoHS_L_4.pdf?src-supplier=Avnet, ComponentLink2URL=http://www.yageo.com/documents/recent/PYu-RC0603_51_RoHS_L_4.pdf?src-supplier=Avnet, ComponentLink3Description=http://www.yageo.com/documents/recent/PYu-RC_Group_51_RoHS_L_10.pdf?src-supplier=Digi-Key, ComponentLink3URL=http://www.yageo.com/documents/recent/PYu-RC_Group_51_RoHS_L_10.pdf?src-supplier=Digi-Key, ComponentLink4Description=http://www.yageo.com/documents/recent/PYu-RC0603_51_RoHS_L_4.pdf?src-supplier=Avnet+Europe, ComponentLink4URL=http://www.yageo.com/documents/recent/PYu-RC0603_51_RoHS_L_4.pdf?src-supplier=Avnet+Europe, Composition="Thick Film", Contact Plating=Tin,Matte, Depth=0.8mm, Features="Moisture Resistant", Height=0.022inch, Lead Free="Lead Free", Length=1.6mm, Military Standard=Not, Number of Terminations=2, Packaging="Tape and Reel", Power Rating=100mW, Pricing 1="1=0.1, 10=0.023, 100=0.0094, 1000=0.00421, 2500=0.00366 (USD)", Stock 1=143871, Supplier 1=Digi-Key, Termination=SMD/SMT, Weight=7.1E-05oz, Width=0.8mm
R4: library part 0603-47.5KR, "RES SMD 47.5K OHM 1% 1/10W 0603", Case/Package=0805, Case Code (Metric)=2012, Manufacturer=Vishay, Manufacturer Part Number=CRCW080547K5FKEA, Max Operating Temperature=155°C, Max Power Dissipation=125mW, Min Operating Temperature=-55°C, Package Quantity=10, Resistance=47.5kR, Resistance Tolerance=1%, Resistor Type="Thick Film", Supplier Part Number 1=311-47.5KHRCT-ND, Temperature Coefficient=100ppm/°C, Voltage Rating=150V, Case Code (Imperial)=0805, ComponentLink1Description=http://www.farnell.com/datasheets/2310790.pdf?src-supplier=Element14, ComponentLink1URL=http://www.farnell.com/datasheets/2310790.pdf?src-supplier=Element14, ComponentLink2Description=http://www.farnell.com/datasheets/2046716.pdf?src-supplier=Element14, ComponentLink2URL=http://www.farnell.com/datasheets/2046716.pdf?src-supplier=Element14, ComponentLink3Description=http://www.vishay.com/docs/20035/dcrcwe3.pdf?src-supplier=Digi-Key, ComponentLink3URL=http://www.vishay.com/docs/20035/dcrcwe3.pdf?src-supplier=Digi-Key, ComponentLink4Description=http://uk.rs-online.com/webdocs/0d98/0900766b80d98b26.pdf?src-supplier=RSComponents, ComponentLink4URL=http://uk.rs-online.com/webdocs/0d98/0900766b80d98b26.pdf?src-supplier=RSComponents, ComponentLink5Description=http://www.alliedelec.com/m/d/0c934d6939ccefa68dbe0b96d821c8cf.pdf?src-supplier=Allied+Electronics, ComponentLink5URL=http://www.alliedelec.com/m/d/0c934d6939ccefa68dbe0b96d821c8cf.pdf?src-supplier=Allied+Electronics, ComponentLink6Description=http://www.vishay.com/docs/20035/dcrcwe3.pdf?src-supplier=Avnet+Asia, ComponentLink6URL=http://www.vishay.com/docs/20035/dcrcwe3.pdf?src-supplier=Avnet+Asia, ComponentLink7Description=http://www.vishay.com/docs/20035/dcrcwe3.pdf?src-supplier=Future+Electronics, ComponentLink7URL=http://www.vishay.com/docs/20035/dcrcwe3.pdf?src-supplier=Future+Electronics, ComponentLink8Description=https://www.verical.com/server-webapp/html/getDatasheet?partID=29115&src-supplier=Verical, ComponentLink8URL=https://www.verical.com/server-webapp/html/getDatasheet?partID=29115&src-supplier=Verical, ComponentLink9Description=http://www.vishay.com/docs/20035/dcrcwe3.pdf?src-supplier=Avnet+Europe, ComponentLink9URL=http://www.vishay.com/docs/20035/dcrcwe3.pdf?src-supplier=Avnet+Europe, ComponentLink10Description=http://www.vishay.com/docs/20035/dcrcwe3.pdf?src-supplier=Avnet, ComponentLink10URL=http://www.vishay.com/docs/20035/dcrcwe3.pdf?src-supplier=Avnet, Construction=Rectangular, Contact Plating=Tin, Depth=1.25mm, Features="Automotive AEC-Q200", Height=0.45mm, Lead Free="Lead Free", Length=2mm, Military Standard=Not, Mount="Surface Mount", Number of Terminations=2, Packaging="Tape and Reel", Power Rating=125mW, Radiation Hardening=No, REACH SVHC=Unknown, RoHS Compliant=Yes, Series=CRCW, Size Code=0805, Supplier 1=Digi-Key, Technology="THICK FILM", Termination=SMD/SMT, Tolerance=1%, Voltage Rating (DC)=150V, Weight=0.000194oz, Width=0.049inch
R5: library part 0603-8.06KR, "RES SMD 8.06K OHM 1% 1/10W 0603", Case/Package=0603, Case Code (Metric)=1608, Manufacturer=Panasonic, Manufacturer Part Number=ERJ-3EKF8061V, Max Operating Temperature=155°C, Max Power Dissipation=100mW, Min Operating Temperature=-55°C, Package Quantity=1, Resistance=8.06kR, Resistor Type="Thick Film", Supplier Part Number 1=P8.06KHDKR-ND, Temperature Coefficient=100ppm/°C, Tolerance=1%, Voltage Rating=75V, Voltage Rating (DC)=50V, Case Code (Imperial)=0603, ComponentLink1Description=http://industrial.panasonic.com/www-data/pdf/AOA0000/AOA0000CE2.pdf?src-supplier=Avnet, ComponentLink1URL=http://industrial.panasonic.com/www-data/pdf/AOA0000/AOA0000CE2.pdf?src-supplier=Avnet, ComponentLink2Description=https://www.alliedelec.com/m/d/623f45ff1957d936ff56d46fd1c28cac.pdf?src-supplier=Allied+Electronics, ComponentLink2URL=https://www.alliedelec.com/m/d/623f45ff1957d936ff56d46fd1c28cac.pdf?src-supplier=Allied+Electronics, ComponentLink3Description=http://www.farnell.com/datasheets/1678782.pdf?src-supplier=Element14, ComponentLink3URL=http://www.farnell.com/datasheets/1678782.pdf?src-supplier=Element14, ComponentLink4Description=http://www.farnell.com/datasheets/1911175.pdf?src-supplier=Element14, ComponentLink4URL=http://www.farnell.com/datasheets/1911175.pdf?src-supplier=Element14, ComponentLink5Description=http://industrial.panasonic.com/www-data/pdf/AOA0000/AOA0000CE2.pdf?src-supplier=Avnet+Europe, ComponentLink5URL=http://industrial.panasonic.com/www-data/pdf/AOA0000/AOA0000CE2.pdf?src-supplier=Avnet+Europe, ComponentLink6Description=http://www.farnell.com/datasheets/1911175.pdf?src-supplier=Farnell, ComponentLink6URL=http://www.farnell.com/datasheets/1911175.pdf?src-supplier=Farnell, Contact Plating=Tin, Depth=0.8mm, Features="Automotive AEC-Q200", Height=0.022inch, Lead Free="Lead Free", Length=1.6mm, Military Standard=Not, Mount="Surface Mount", Number of Terminations=2, Packaging="Tape and Reel", Power Rating=100mW, Pricing 1="1=0.1, 10=0.032, 100=0.013, 1000=0.00583, 2500=0.00506 (USD)", Radiation Hardening=No, REACH SVHC=Unknown, Stock 1=296308, Supplier 1=Digi-Key, Termination=SMD/SMT, Width=0.8mm
R6: library part 0805-5.1KR, "RES SMD 5.1K OHM 1% 1/8W 0805", Case/Package=0805, Manufacturer="TE Connectivity", Manufacturer Part Number=1623257-1, Max Operating Temperature=125°C, Max Power Dissipation=125mW, Min Operating Temperature=-55°C, Package Quantity=5000, Resistance=5.1kR, Resistor Type="Thick Film", Supplier Part Number 1=A126379DKR-ND, Temperature Coefficient=100ppm/°C, Tolerance=1%, ComponentLink1Description=http://www.te.com/commerce/DocumentDelivery/DDEController?Action=showdoc&DocId=Data+Sheet%7F1773204%7FF%7Fpdf%7FEnglish%7FENG_DS_1773204_F.pdf&src-supplier=Avnet+Europe, ComponentLink1URL=http://www.te.com/commerce/DocumentDelivery/DDEController?Action=showdoc&DocId=Data+Sheet%7F1773204%7FF%7Fpdf%7FEnglish%7FENG_DS_1773204_F.pdf&src-supplier=Avnet+Europe, ComponentLink2Description=http://www.te.com/commerce/DocumentDelivery/DDEController?Action=srchrtrv&DocNm=1773204&DocType=DS&DocLang=English&src-supplier=Digi-Key, ComponentLink2URL=http://www.te.com/commerce/DocumentDelivery/DDEController?Action=srchrtrv&DocNm=1773204&DocType=DS&DocLang=English&src-supplier=Digi-Key, ComponentLink3Description=http://www.onlinecomponents.com/productFiles/mf-AMP/eng_ds_1773204_e.pdf?src-supplier=Onlinecomponents.com, ComponentLink3URL=http://www.onlinecomponents.com/productFiles/mf-AMP/eng_ds_1773204_e.pdf?src-supplier=Onlinecomponents.com, Construction=Rectangular, Depth=1.25mm, Height=0.026inch, Length=2mm, Military Standard=Not, Mount="Surface Mount", Number of Terminations=2, Packaging="Tape and Reel", Power Rating=125mW, Pricing 1="1=0.1, 10=0.049, 100=0.02, 1000=0.00898, 2500=0.00779 (USD)", Radiation Hardening=No, RoHS Compliant=Yes, Series="CRG, Neohm", Stock 1=34405, Supplier 1=Digi-Key, Width=0.049inch
R7: library part 0603-117KR, "RES 117K OHM 0.5% 1/10W 0603", Case/Package=0603, Manufacturer=Yageo, Manufacturer Part Number=RT0603DRE07117KL, Max Operating Temperature=155°C, Max Power Dissipation=100mW, Min Operating Temperature=-55°C, Resistance=117kR, Resistor Type="Thin Film", Supplier Part Number 1=13-RT0603DRE07117KLDKR-ND, Temperature Coefficient=50ppm/°C, Tolerance=0.5%, ComponentLink1Description=http://www.yageo.com/documents/recent/PYu-RT_1-to-0.01_RoHS_L_9.pdf?src-supplier=Digi-Key, ComponentLink1URL=http://www.yageo.com/documents/recent/PYu-RT_1-to-0.01_RoHS_L_9.pdf?src-supplier=Digi-Key, Number of Terminations=2, Packaging="Tape and Reel", Pricing 1="1=0.1, 10=0.092, 100=0.0352, 1000=0.01549, 2500=0.01338 (USD)", Stock 1=5704, Supplier 1=Digi-Key
R8: library part 0603-10KR, "RES 10K OHM 1% 1/10W 0603", Case/Package=0805, Case Code (Metric)=2012, Manufacturer=Yageo, Manufacturer Part Number=RC0805FR-0710KL, Max Operating Temperature=155°C, Max Power Dissipation=125mW, Min Operating Temperature=-55°C, Package Quantity=1, Resistance=10kR, Supplier Part Number 1=13-RC0603FR-1010KLCT-ND, Temperature Coefficient=100ppm/°C, Tolerance=1%, Voltage Rating=150V, Case Code (Imperial)=0805, ComponentLink1Description=http://www.yageo.com/documents/recent/PYu-RC_Group_51_RoHS_L_9.pdf?src-supplier=Mouser, ComponentLink1URL=http://www.yageo.com/documents/recent/PYu-RC_Group_51_RoHS_L_9.pdf?src-supplier=Mouser, ComponentLink2Description=http://www.farnell.com/datasheets/2167052.pdf?src-supplier=Element14, ComponentLink2URL=http://www.farnell.com/datasheets/2167052.pdf?src-supplier=Element14, ComponentLink3Description=http://www.yageo.com/documents/recent/PYu-RC_Group_51_RoHS_L_10.pdf?src-supplier=Digi-Key, ComponentLink3URL=http://www.yageo.com/documents/recent/PYu-RC_Group_51_RoHS_L_10.pdf?src-supplier=Digi-Key, ComponentLink4Description=http://www.yageo.ru/pdf/RC0805.pdf?src-supplier=Future+Electronics, ComponentLink4URL=http://www.yageo.ru/pdf/RC0805.pdf?src-supplier=Future+Electronics, Composition="Thick Film", Depth=1.25mm, Features="Moisture Resistant", Height=0.024inch, Lead Free="Lead Free", Length=2mm, Military Standard=Not, Number of Terminations=2, Packaging="Tape and Reel", Power Rating=125mW, REACH SVHC=Unknown, Supplier 1=Digi-Key, Termination=SMD/SMT, Width=0.049inch
R10: library part 0603-3.4KR, "Res Thin Film 0603 3.4K Ohm 0.1% 1/10W ±25ppm/°C Molded SMD Paper T/R", Case/Package=0603, Case Code (Metric)=1608, Manufacturer="TE Connectivity", Manufacturer Part Number=RP73PF1J3K4BTDF, Max Operating Temperature=155°C, Min Operating Temperature=-55°C, Power Rating=166mW, Resistance=3.4kR, Resistance Tolerance=0.1%, Resistor Type="Thin Film", Supplier Part Number 1=A110159DKR-ND, Temperature Coefficient=25ppm/°C, Voltage Rating=100V, Case Code (Imperial)=0603, ComponentLink1Description=http://www.farnell.com/datasheets/1635325.pdf?src-supplier=Element14, ComponentLink1URL=http://www.farnell.com/datasheets/1635325.pdf?src-supplier=Element14, Depth=0.8mm, Height=0.45mm, Length=1.55mm, Packaging="Cut Tape", Pricing 1="1=0.69, 10=0.494, 100=0.2568 (USD)", REACH SVHC="No SVHC", RoHS Compliant=Yes, Series=RP73, Stock 1=669, Supplier 1=Digi-Key, Technology="THIN FILM", Termination=SMD/SMT, Tolerance=0.1%, Voltage Rating (DC)=100V
R11 R12: library part 0603-2.2KR, "RES SMD 2.2K OHM 1% 1/10W 0603", Case/Package=0603, Manufacturer="Yageo Phycomp", Manufacturer Part Number=RC0603FR-072K2L, Max Operating Temperature=155°C, Min Operating Temperature=-55°C, Power Rating=100mW, Resistance=2.2kR, Supplier Part Number 1=311-2.20KHRDKR-ND, Temperature Coefficient=100ppm/°C, Tolerance=1%, Voltage Rating (DC)=50V, Depth=0.8mm, Height=0.45mm, Lead Free="Lead Free", Length=1.6mm, Mount="Surface Mount", Number of Pins=2, Packaging="Cut Tape", Pricing 1="1=0.1, 10=0.023, 100=0.0094, 1000=0.00421, 2500=0.00366 (USD)", REACH SVHC="No SVHC", Stock 1=8205077, Supplier 1=Digi-Key, Width=800um